# Altium PCB PCB.PcbDoc
Units mil, origin at the board's own origin, x right, y up, seen from the top; angles counter-clockwise.
Board outline 3565 x 2470 mil, 2 copper layers (Top Layer, Bottom Layer); 18 components, 11 nets, 39 pads, 0 vias.
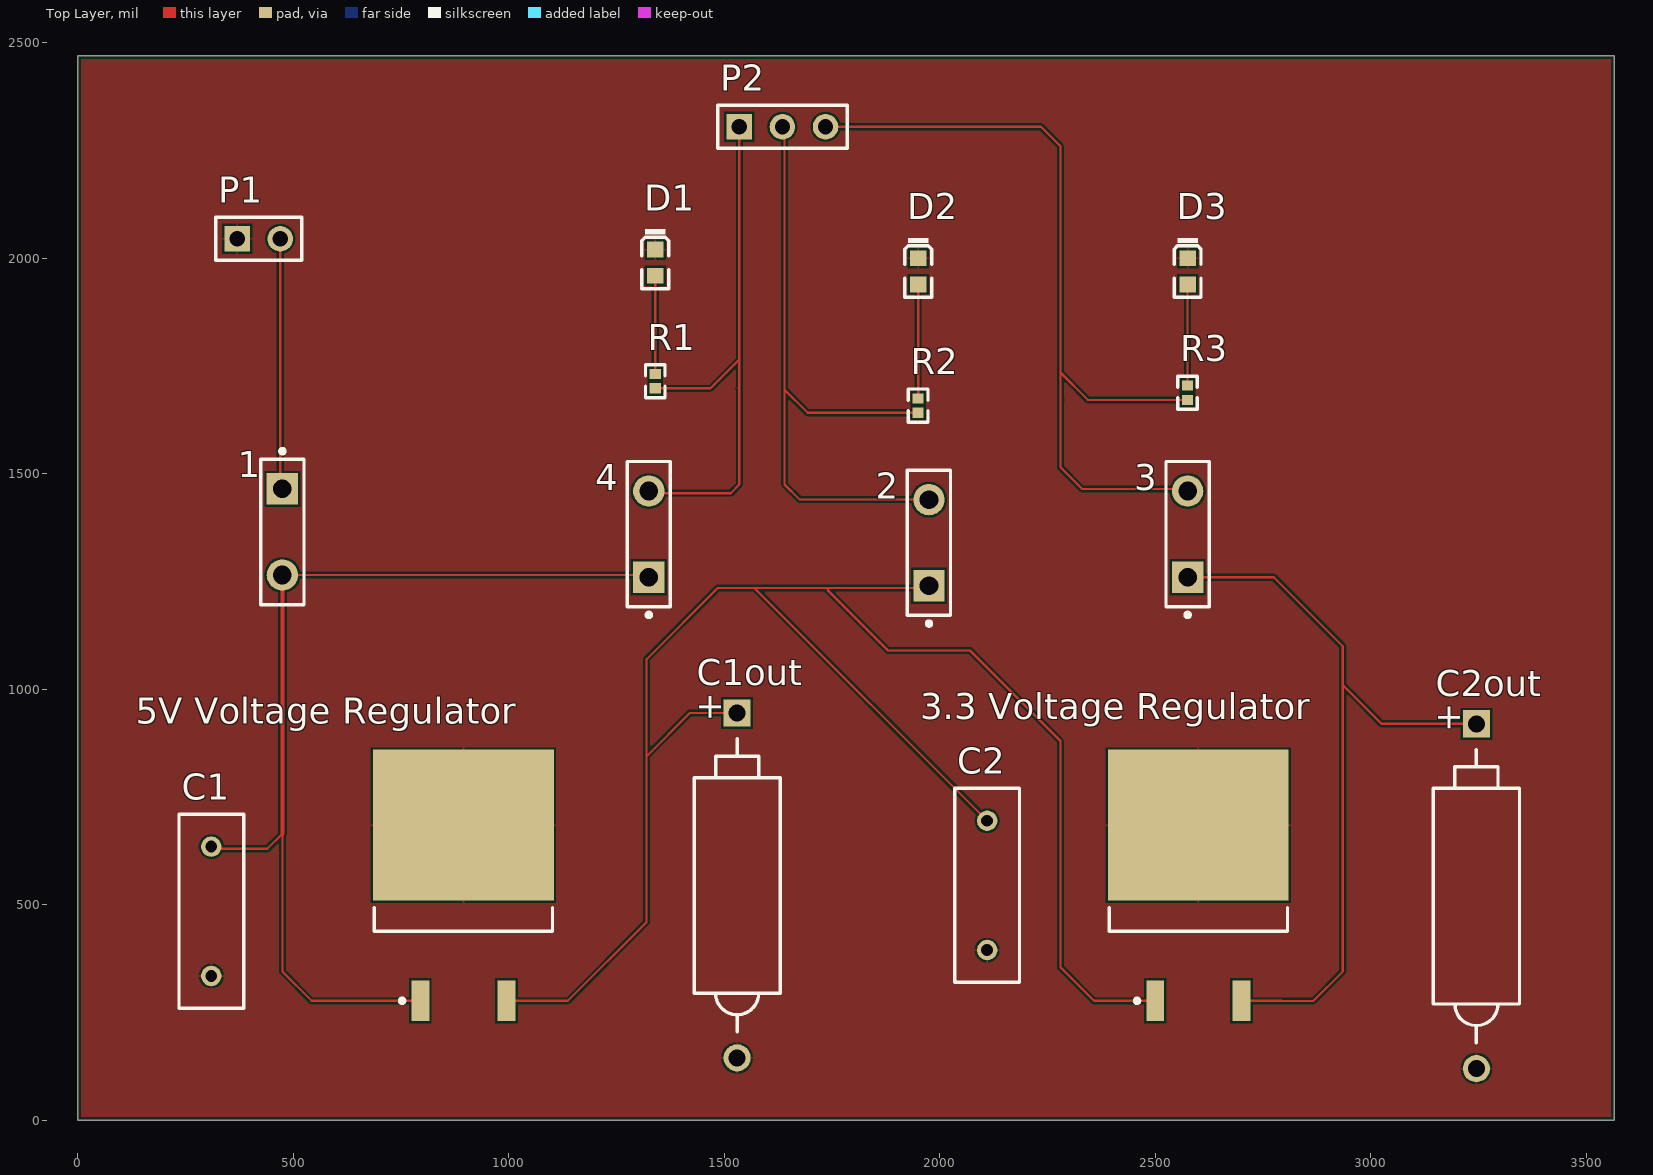
[diagram p0: Top Layer view]
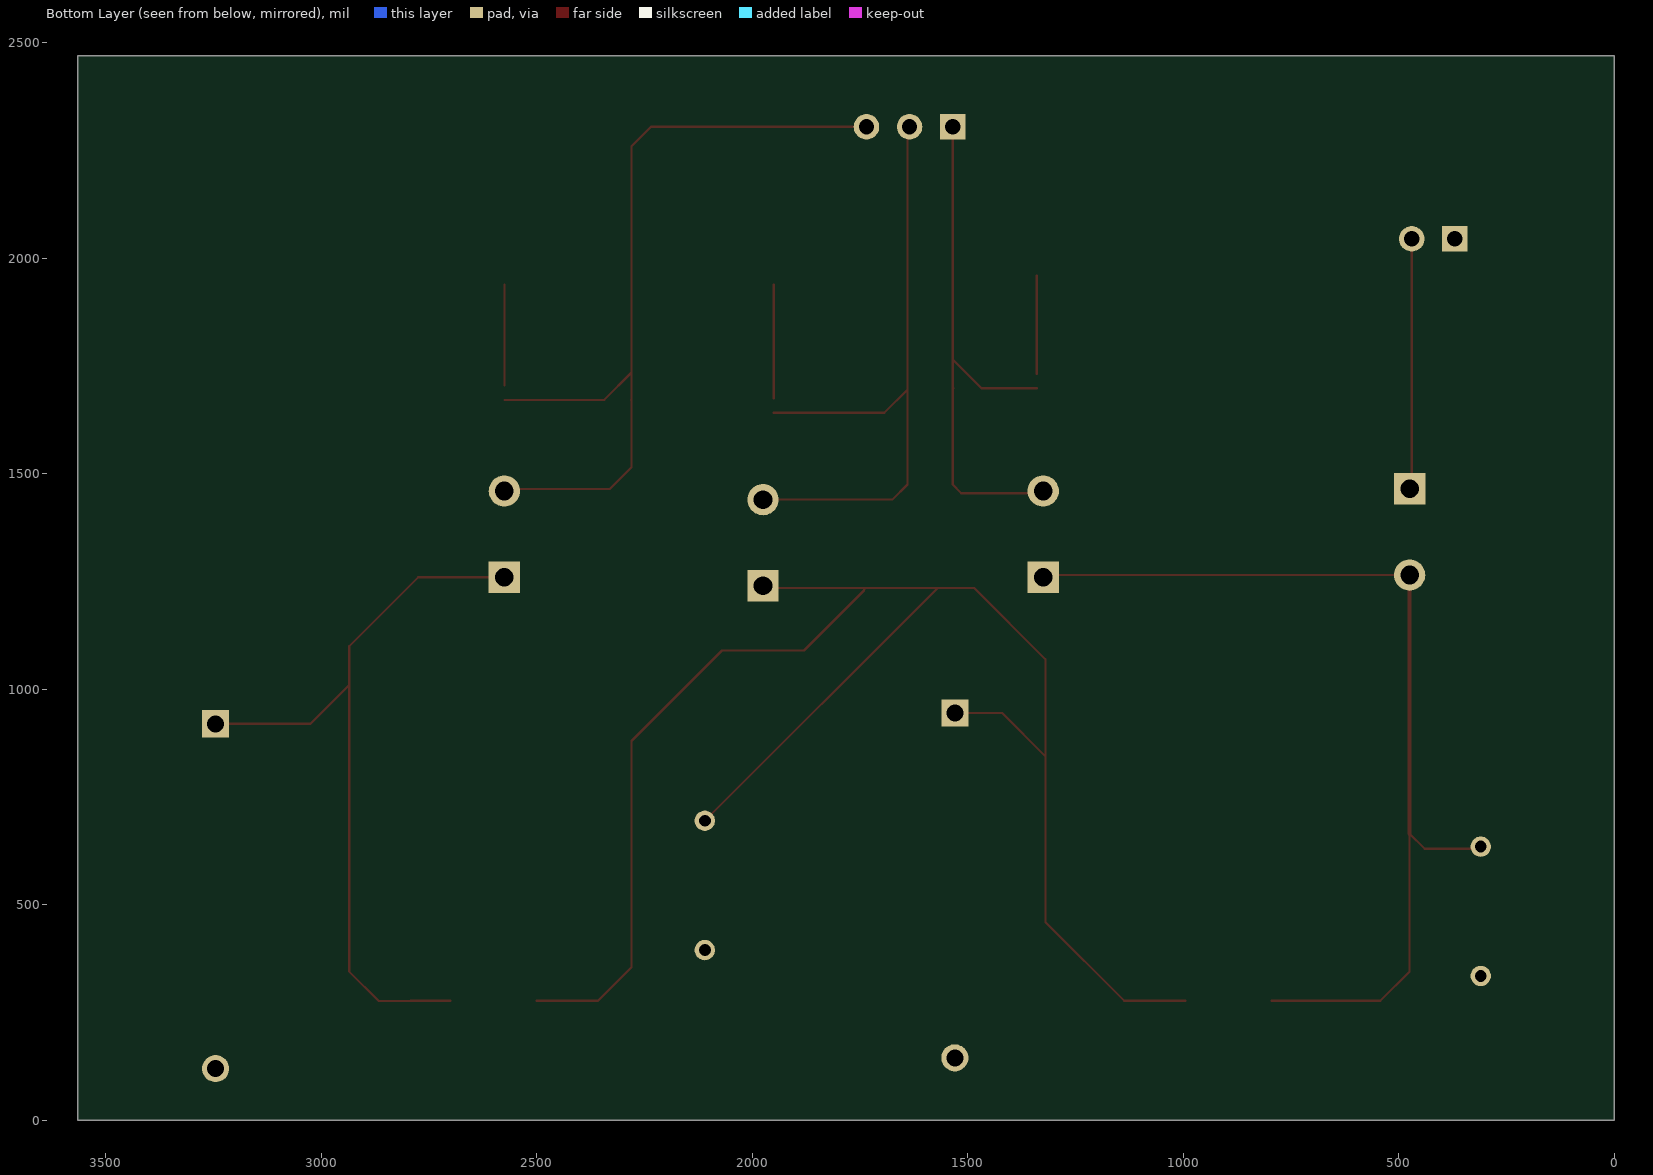
[diagram p1: Bottom Layer view, seen from below]

## Layer stack, top to bottom
Top Solder: solder mask 0.4, Solder Resist, Dk 3.5
Top Layer: signal copper 1.4
Dielectric 1: dielectric 12.6, FR-4, Dk 4.8
Bottom Layer: signal copper 1.4
Bottom Solder: solder mask 0.4, Solder Resist, Dk 3.5

## Board outline
0,0 3565,0 3565,2470 0,2470

## Design rules (kind name [scope] priority, off if disabled: settings)
BoardOutlineClearance [All] p1: gap=7.87 ignorepadtopadclearanceinfootprint=FALSE
Clearance [All] p1: gap=5 ignorepadtopadclearanceinfootprint=FALSE except(9.84: Arc-Hole Track-Hole SMDPad-Hole THPad-Hole Via-Hole Fill-Hole Poly-Hole Region-Hole Text-Hole)
ComponentClearance [All] p1: gap=5 collisioncheckmode=3 verticalgap=5 showdistances=TRUE
DiffPairsRouting [All] p1: maxlimit=10 minlimit=5 mostfreqgap=5 toplayer_minwidth=5 toplayer_maxwidth=1000 toplayer_prefwidth=5 bottomlayer_minwidth=5 bottomlayer_maxwidth=1000 bottomlayer_prefwidth=5 maxuncoupledlength=500
Height [All] p1: minheight=0 maxheight=71497.94 prefheight=500
HoleSize [All] p1: absolutevalues=TRUE maxlimit=248.03 minlimit=11.81 maxpercent=80.000 minpercent=20.000
HoleToHoleClearance [All] p1: gap=9.84 allowstackedmicrovias=FALSE
MinimumAnnularRing [All] p1: minimumring=3
MinimumSolderMaskSliver [All] p1: minsoldermaskwidth=0
PlaneClearance [All] p1: clearance=5
PlaneConnect PlaneConnectPowerPads [InPadClass('PowerPads')] p1: planeconnectstyle=Direct reliefexpansion=20 reliefentries=4 reliefconductorwidth=10 reliefairgap=10
PlaneConnect [All] p2: pad.planeconnectstyle=Relief pad.reliefexpansion=11.81 pad.reliefentries=4 pad.reliefconductorwidth=5 pad.reliefairgap=5 via.planeconnectstyle=Direct via.reliefexpansion=11.81 via.reliefentries=4 via.reliefconductorwidth=5 via.reliefairgap=5
PolygonConnect PolygonConnectPowerPads [All vs (InPadClass('PowerPads'))] p1: connectstyle=Direct reliefconductorwidth=10 reliefentries=4 polygonreliefangle="90 Angle" airgapwidth=10
PolygonConnect [All] p2: thpad.connectstyle=Relief thpad.reliefconductorwidth=5 thpad.reliefentries=4 thpad.polygonreliefangle="90 Angle" thpad.airgapwidth=5 smdpad.connectstyle=Relief smdpad.reliefconductorwidth=5 smdpad.reliefentries=4 smdpad.polygonreliefangle="90 Angle" smdpad.airgapwidth=5 via.connectstyle=Direct via.reliefconductorwidth=5 via.reliefentries=4 via.polygonreliefangle="90 Angle" via.airgapwidth=5
RoutingVias [All] p1: holewidth=11.81 width=23.62 viastyle="Through Hole" minholewidth=11.81 minwidth=23.62 maxholewidth=23.62 maxwidth=259.84
SilkToSilkClearance [All] p1: silktosilkclearance=0
SilkToSolderMaskClearance [IsPad] p1: minsilkscreentomaskgap=5 clearancetoexposedcopper=TRUE
SolderMaskExpansion [All] p1: expansion=2.95 istentingtop=FALSE
Width [All] p1: maxlimit=1000 minlimit=5 preferedwidth=5 minimp=50.000000 maximp=50.000000 favimp=50.000000
20 further rules are at their usual default settings.

## Components (designator, comment, footprint, x,y, rotation, side; value= is the part's Value field where it differs from the comment)
1 "SW-PB 1" SPST-2 475,1365 r270 top
2 "SW-PB 1" SPST-2 1975,1340 r90 top
3 "SW-PB 1" SPST-2 2575,1360 r90 top
"3.3 Voltage Regulator" "Volt Reg" D2PAK_N 2600,545 r90 top
4 "SW-PB 1" SPST-2 1325,1360 r90 top
"5V Voltage Regulator" "Volt Reg" D2PAK_N 895,545 r90 top
C1 "" RAD-0.3 310,485 r90 top value=0.47μF
C1out "" POLAR0.8 1530,545 r90 top value=22μF
C2 "" RAD-0.3 2110,545 r90 top value="0.47 μF"
C2out "" POLAR0.8 3245,520 r90 top value=33μF
D1 "0603 Red" 0603_LED_S1 1340,1989.69 r270 top
D2 "0603 Red" 0603_LED_S1 1950,1969.69 r270 top
D3 "0603 Red" 0603_LED_S1 2575,1969.69 r270 top
P1 "Header 2" HDR1X2 370,2045 r0 top
P2 "Header 3" HDR1X3 1535,2305 r0 top
R1 "1KΩ ±1%" 0402_R 1340,1715 r270 top
R2 "1KΩ ±1%" 0402_R 1950,1658.27 r270 top
R3 "1KΩ ±1%" 0402_R 2575,1688.27 r270 top

## Footprints (in the part's own frame and the unit in brackets; to place one, negate y for a bottom-side part, rotate by r counter-clockwise, add the part's x,y. Pads: shape width x height; smd on the part's side, far side on the other; paste and mask are expansions set on the pad)
0402_R [mm]
  rect 0.6x0.65 smd mask+0.051: 1(-0.425,0) 2(0.425,0)
  silkscreen extent -0.97,-0.58 0.97,0.58, body extent -0.57,-0.27 0.58,0.28, height 0.41
0603_LED_S1 [mm]
  rect 0.93x0.98 smd: A(0.77,0) K(-0.77,0)
  silkscreen extent -1.97,-0.79 1.54,0.79, body extent -0.8,-0.4 0.8,0.4, height 0.6
D2PAK_N [mm] "D2-PAK, 4-Leads, Body 8.8x10.4mm, Pitch 2.54mm, Lead Span 15.1mm, IPC Medium Density"
  rect 2.4x1.05 smd: 1(-6.8,2.54) 3(-6.8,-2.54)
  rect 8.9x10.65 smd: 2(3.55,0)
  silkscreen extent -6.92,-5.25 -1.3,5.25, body extent -2.7,-5.28 6.3,5.28, height 4.69
HDR1X2 [mm] "Connector; Header; 2 Position"
  rect 1.5x1.5 hole 0.9: 1(0,0)
  round 1.5 hole 0.9: 2(2.54,0)
  silkscreen extent -1.27,-1.27 3.81,1.27
HDR1X3 [mm] "Connector; Header; 3 Position"
  rect 1.5x1.5 hole 0.9: 1(0,0)
  round 1.5 hole 0.9: 2(2.54,0) 3(5.08,0)
  silkscreen extent -1.27,-1.27 6.35,1.27
POLAR0.8 [mm] "Polarized Capacitor; 2 Leads"
  rect 1.6x1.6 hole 1: 1(10.16,0)
  round 1.6 hole 1: 2(-10.16,0)
  silkscreen extent -8.64,-2.54 8.64,2.54
RAD-0.3 [mm] "Radial Cap, Thru-Hole; 2 Leads; 0.3 in Pin Spacing"
  round 1.2 hole 0.7: 1(-3.81,0) 2(3.81,0)
  silkscreen extent -5.71,-1.91 5.71,1.91
SPST-2 [mm] "Switch; 2 Leads"
  rect 1.85x1.85 hole 1.1: 1(-2.54,0)
  round 1.85 hole 1.1: 2(2.54,0)
  silkscreen extent -4.89,-1.27 4.28,1.27

## Part data
1 2 3 4: library part SW-PB, "Switch", LatestRevisionDate=17-Jul-2002, LatestRevisionNote="Re-released for DXP Platform.", PackageDescription="Switch; 2 Leads", PackageReference=SPST-2, Published=24-Mar-1999, Publisher="Altium Limited"
"3.3 Voltage Regulator" "5V Voltage Regulator": "Voltage Regulator", LatestRevisionDate=29-May-2009, LatestRevisionNote="IPC-7351 Footprint Added.", PackageDescription="3-Pin Transistor Outline Package 2.54 mm Pitch, 15.1 mm Lead Span", PackageReference=D2PAK, Published=24-Mar-1999, Publisher="Altium Limited"
C1 C2: library part Cap, "Capacitor", LatestRevisionDate=17-Jul-2002, LatestRevisionNote="Re-released for DXP Platform.", PackageDescription="Radial Cap, Thru-Hole; 2 Leads; 0.3 in Pin Spacing", PackageReference=RAD-0.3, Published=8-Jun-2000, Publisher="Altium Limited"
C1out C2out: library part "Cap Pol2", "Polarized Capacitor (Axial)", LatestRevisionDate=17-Jul-2002, LatestRevisionNote="Re-released for DXP Platform.", PackageDescription="Polarized Capacitor; 2 Leads", PackageReference=POLAR0.8, Published=8-Jun-2000, Publisher="Altium Limited"
D1 D2 D3: library part "0603 LED Red", "LED", Color=Red, Package=0603, SuppliersPartNumber=C2286, ComponentLink1Description=供应商链接, ComponentLink1URL=http://www.szlcsc.com/product/details_2659.html, Supplier=LC
P1: "Header, 2-Pin", LatestRevisionDate=17-Jul-2002, LatestRevisionNote="Re-released for DXP Platform.", Publisher="Altium Limited"
P2: "Header, 3-Pin", LatestRevisionDate=17-Jul-2002, LatestRevisionNote="Re-released for DXP Platform.", Publisher="Altium Limited"
R1 R2 R3: library part "0402 1K (1001) 1%", "Chip resistor", Manufacturer="Uniroyal Elec", Package=0402, PartNumber=0402WGF1001TCE, Power=1/16W, Resistance=1KΩ, SuppliersPartNumber=C11702, Tolerance=1%, ComponentLink1Description="Supplier link", ComponentLink1URL=http://www.szlcsc.com/product/details_12256.html, Supplier=LC

## Nets (pads, with @x,y where several pads share a name; then routed paths per layer and width w, separated by ;. In a path a pad name is that pad's centre, name@x,y a point inside that pad or via, vN(x,y) a via of type N, cw(c..) or ccw(c..) an arc to the next point about the centre after c; other vN are vias at no path point)
3.3V: 3.1 "3.3 Voltage Regulator.3" C2out.1 | length 1791.8
  Top Layer w5: 3.1 2775,1260 2935,1100 2935,1010 ; 2700,277.28 2792.51,277.28 2792.73,277.07 2867.07,277.07 2935,345 2935,1010 ; C2out.1 3025,920 2935,1010
5V: 2.1 "3.3 Voltage Regulator.1" "5V Voltage Regulator.3" C1out.1 C2.2 | length 4218.4
  Top Layer w5: 995,277.28 1137.28,277.28 1320,460 1320,845 ; C1out.1 1420,945 1320,845 ; 2.1 1970,1235 1740,1235 ; C2.2 1570,1235 ; 2500,277.28 2357.72,277.28 2280,355 2280,880 2070,1090 1880,1090 1740.62,1229.38 1740.62,1230.62 1740,1231.25 1740,1235 ; 1320,845 1320,1070 1485,1235 1570,1235 ; 1570,1235 1740,1235
+12: 1.2 4.1 "5V Voltage Regulator.1" C1.2 | length 2301.7
  Top Layer w5: C1.2 315,630 440,630 475,665 475,345 542.72,277.28 795,277.28 ; 1.2 1320,1265 4.1
  Top Layer w10: 475,665 1.2
GND: "3.3 Voltage Regulator.2" "5V Voltage Regulator.2" C1.1 C1out.2 C2.1 C2out.2 D1.K D2.K D3.K P1.1
Net1_1: 1.1 P1.2 | length 582.1
  Top Layer w5: P1.2 470,1470 1.1
Net2_2: 2.2 P2.2 R2.2 | length 1513.7
  Top Layer w5: P2.2 1640,2300 1640,1695 ; R2.2 1693.46,1641.54 1640,1695 ; 2.2 1675,1440 1640,1475 1640,1695
Net3_2: 3.2 P2.3 R3.2 | length 1949.9
  Top Layer w5: P2.3 2235,2305 2280,2260 2280,1735 ; 2281.54,1671.54 2280,1670 ; 3.2 2570,1465 2330,1465 2280,1515 2280,1670 ; R3.2 2343.46,1671.54 2280,1735 ; 2280,1670 2280,1735
Net4_2: 4.2 P2.1 R1.2 | length 1275.4
  Top Layer w5: 4.2 1330,1455 1515,1455 1535,1475 1535,1700 ; R1.2 1468.27,1698.27 1535,1765 ; 1533.27,1698.27 1535,1700 ; P2.1 1535,1765 ; 1535,1700 1535,1765
NetD1_A: D1.A R1.1 | length 227.6
  Top Layer w5: R1.1 D1.A
NetD2_A: D2.A R2.1 | length 264.4
  Top Layer w5: R2.1 D2.A
NetD3_A: D3.A R3.1 | length 234.4
  Top Layer w5: R3.1 D3.A

## Polygon pours and split planes (outlines as drawn)
GND on Top Layer "GND_L01_P000" (solid, pour order 0): 0,0 0,2470 3565,2470 3565,0

## Text inside footprints (layer, text, board x,y; h text height)
C1out: Top Overlay "+" at 1492.6,925 h59.06 r90
C2out: Top Overlay "+" at 3207.6,900 h59.06 r90